# Altium PCB PCB.PcbDoc
Units mm, origin at the board's own origin, x right, y up, seen from the top; angles counter-clockwise.
Board outline 30 x 77.5 mm, 2 copper layers (Top Layer, Bottom Layer); 6 components, 2 nets, 46 pads, 0 vias.
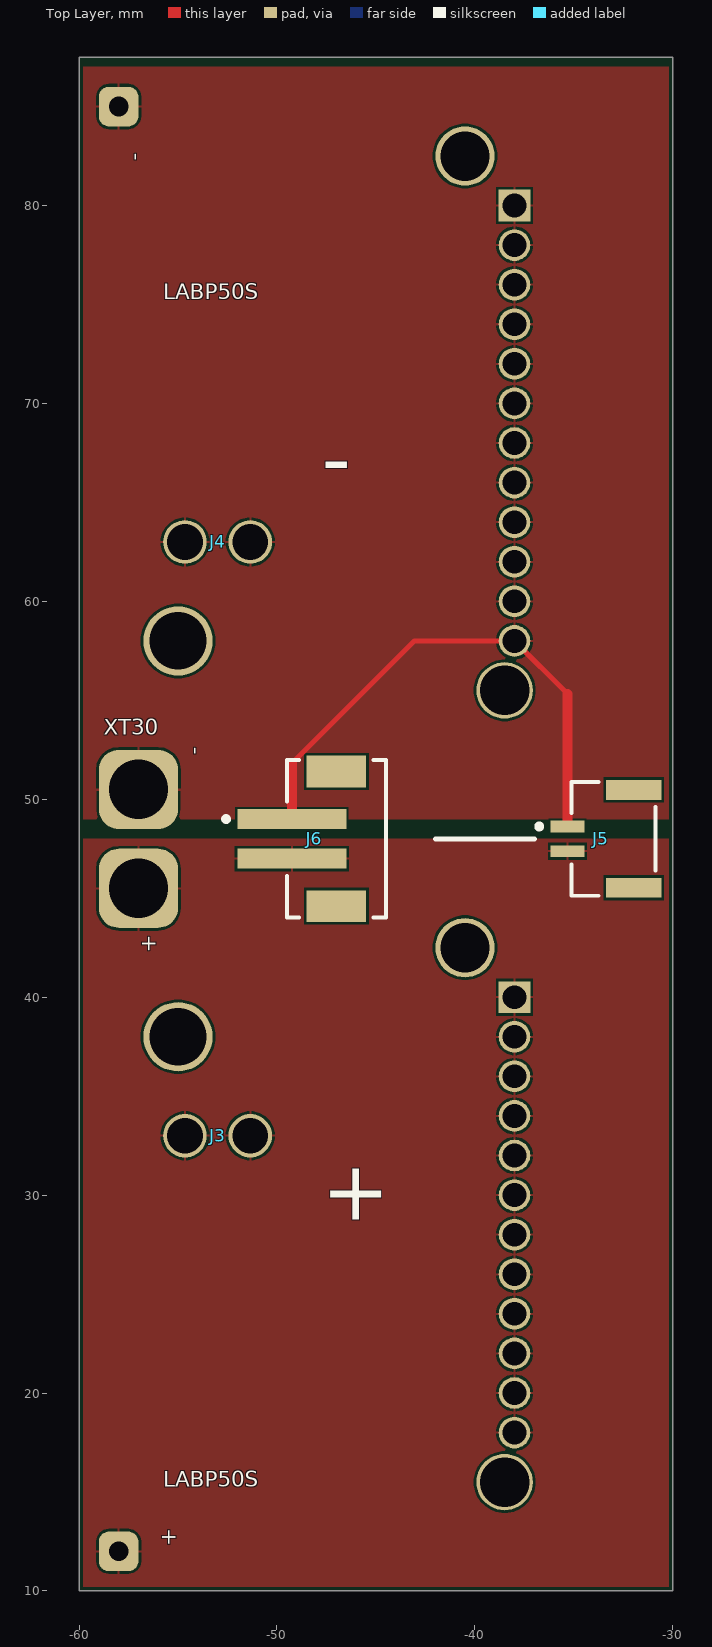
[diagram p0: Top Layer view]
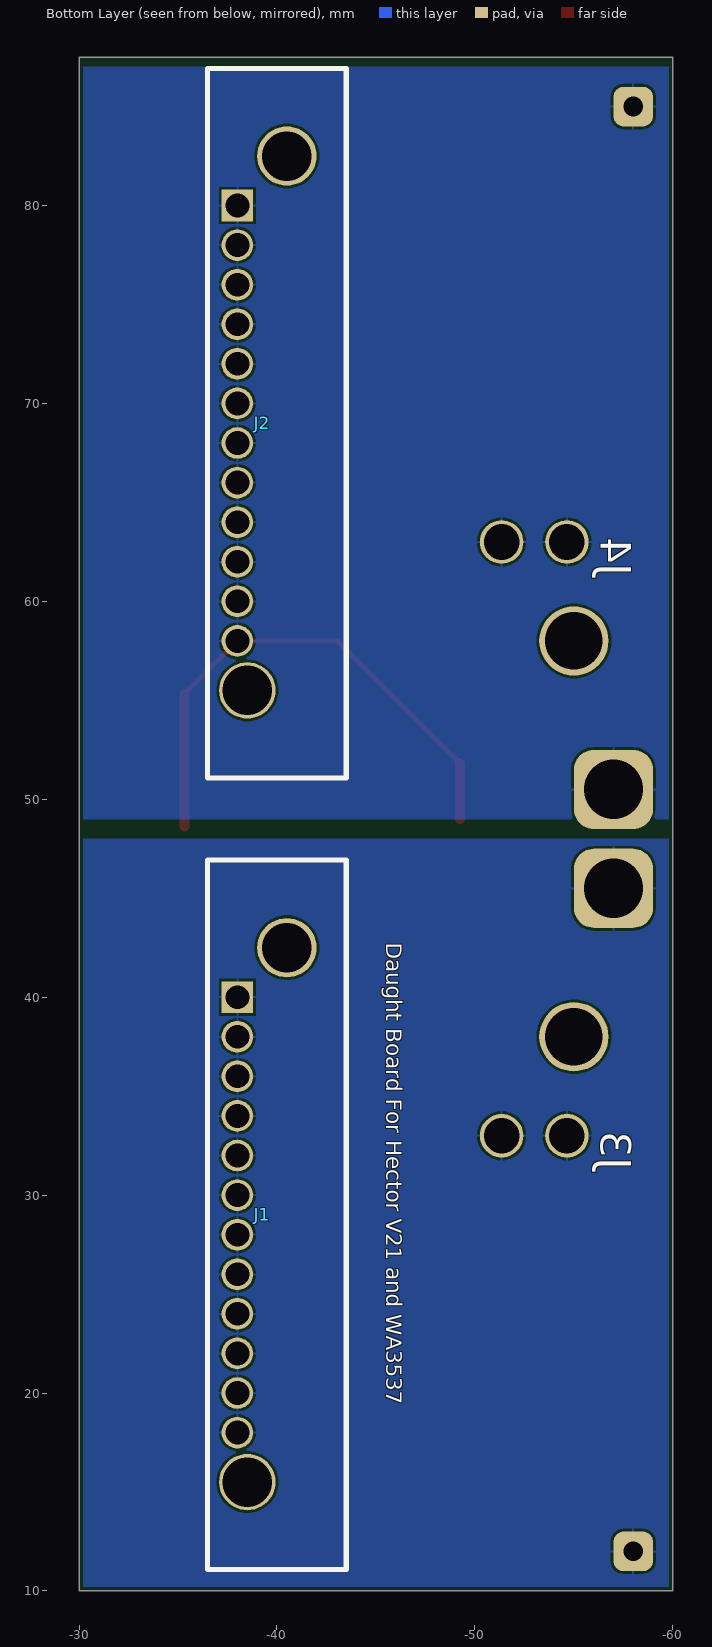
[diagram p1: Bottom Layer view, seen from below]
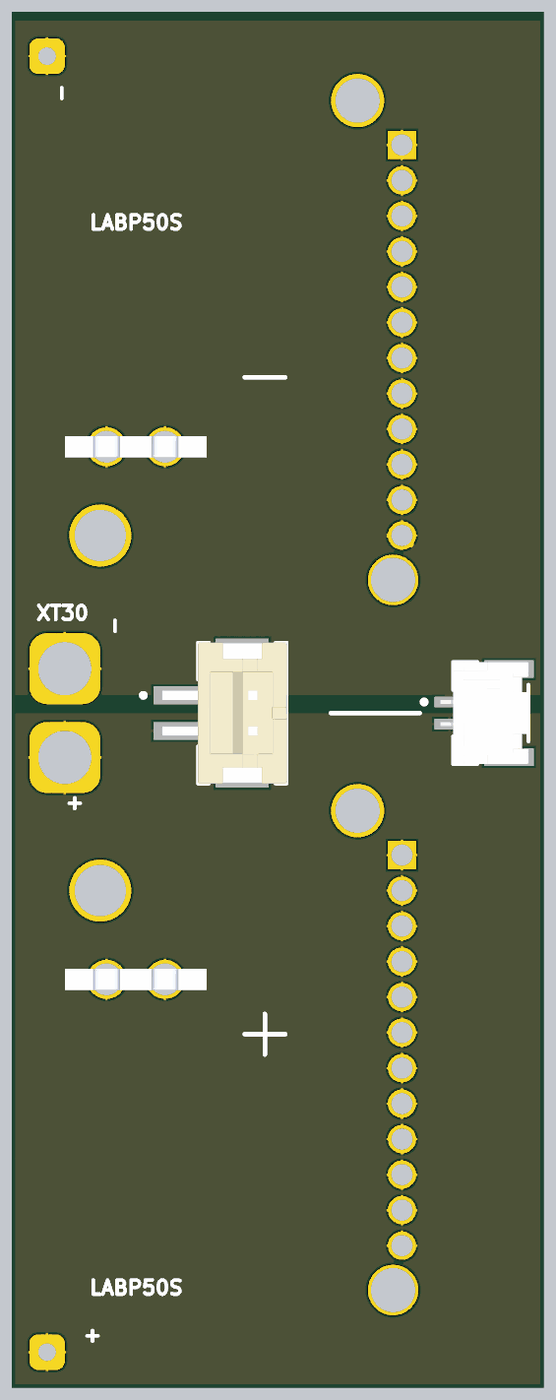
[diagram p2: 3D render of the assembled board from above, using the file's embedded part models]

## Layer stack, top to bottom
Top Solder: solder mask 0.0102, Solder Resist, Dk 3.5
Top Layer: signal copper 0.0356
Dielectric 1: dielectric 0.32, FR-4, Dk 4.8
Bottom Layer: signal copper 0.0356
Bottom Solder: solder mask 0.0102, Solder Resist, Dk 3.5

## Board outline
-60,10 -30,10 -30,87.5 -60,87.5

## Design rules (kind name [scope] priority, off if disabled: settings)
BoardOutlineClearance [All] p1: gap=0.2 ignorepadtopadclearanceinfootprint=FALSE
Clearance [All] p1: gap=0.127 ignorepadtopadclearanceinfootprint=TRUE except(0.254: Arc-Hole Track-Hole SMDPad-Hole THPad-Hole Via-Hole Fill-Hole Poly-Hole Region-Hole Text-Hole)
ComponentClearance [All] p1: gap=0.127 collisioncheckmode=3 verticalgap=0.127 showdistances=TRUE
DiffPairsRouting [All] p1: maxlimit=0.254 minlimit=0.127 mostfreqgap=0.127 toplayer_minwidth=0.127 toplayer_maxwidth=25.4 toplayer_prefwidth=0.127 bottomlayer_minwidth=0.127 bottomlayer_maxwidth=25.4 bottomlayer_prefwidth=0.127 maxuncoupledlength=12.7
Height [All] p1: minheight=0 maxheight=1816.048 prefheight=12.7
HoleSize [All] p1: absolutevalues=TRUE maxlimit=6.3 minlimit=0.3 maxpercent=80.000 minpercent=20.000
HoleToHoleClearance [All] p1: gap=0.254 allowstackedmicrovias=FALSE
MinimumAnnularRing [All] p1: minimumring=0.152
MinimumSolderMaskSliver [All] p1: minsoldermaskwidth=0.152
PlaneClearance [All] p1: clearance=0.127
PlaneConnect PlaneConnectPowerPads [InPadClass('PowerPads')] p1: planeconnectstyle=Direct reliefexpansion=0.508 reliefentries=4 reliefconductorwidth=0.254 reliefairgap=0.254
PlaneConnect [All] p2: pad.planeconnectstyle=Relief pad.reliefexpansion=0.3 pad.reliefentries=4 pad.reliefconductorwidth=0.127 pad.reliefairgap=0.127 via.planeconnectstyle=Direct via.reliefexpansion=0.3 via.reliefentries=4 via.reliefconductorwidth=0.127 via.reliefairgap=0.127
PolygonConnect PolygonConnectPowerPads [All vs (InPadClass('PowerPads'))] p1: connectstyle=Direct reliefconductorwidth=0.254 reliefentries=4 polygonreliefangle="90 Angle" airgapwidth=0.254
PolygonConnect [All] p2: thpad.connectstyle=Relief thpad.reliefconductorwidth=0.127 thpad.reliefentries=4 thpad.polygonreliefangle="90 Angle" thpad.airgapwidth=0.127 smdpad.connectstyle=Relief smdpad.reliefconductorwidth=0.127 smdpad.reliefentries=4 smdpad.polygonreliefangle="90 Angle" smdpad.airgapwidth=0.127 via.connectstyle=Direct via.reliefconductorwidth=0.127 via.reliefentries=4 via.polygonreliefangle="90 Angle" via.airgapwidth=0.127
RoutingVias [All] p1: holewidth=0.3 width=0.6 viastyle="Through Hole" minholewidth=0.3 minwidth=0.6 maxholewidth=0.6 maxwidth=6.6
SilkToSilkClearance [All] p1: silktosilkclearance=0.127
SilkToSolderMaskClearance [IsPad] p1: minsilkscreentomaskgap=0.127 clearancetoexposedcopper=TRUE
SolderMaskExpansion [All] p1: expansion=0.051 istentingtop=FALSE
SupplyNets "Schematic Supply Nets_1" [InNet('VCC')] p1: voltage=0.000
SupplyNets "Schematic Supply Nets" [InNet('GND')] p2: voltage=0.000
UnRoutedNet [All] p1: checkbadconnections=TRUE
Width Width_10mil [All] p1: maxlimit=25.4 minlimit=0.254 preferedwidth=0.254 minimp=50.000000 maximp=50.000000 favimp=50.000000
Width Width_6mil [All] p2: maxlimit=25.4 minlimit=0.152 preferedwidth=0.152 minimp=50.000000 maximp=50.000000 favimp=50.000000
Width Power_20mil [All] p3: maxlimit=25.4 minlimit=0.508 preferedwidth=0.508 minimp=50.000000 maximp=50.000000 favimp=50.000000
Width Power_12mil [All] p4: maxlimit=25.4 minlimit=0.305 preferedwidth=0.305 minimp=50.000000 maximp=50.000000 favimp=50.000000
Width Width_5mil [All] p5: maxlimit=25.4 minlimit=0.127 preferedwidth=0.127 minimp=50.000000 maximp=50.000000 favimp=50.000000
19 further rules are at their usual default settings.

## Components (designator, comment, footprint, x,y, rotation, side; value= is the part's Value field where it differs from the comment)
J1 "A01F-H1-A Female" A01F-H1-A -38,29 r270 bottom
J2 "A01F-H1-A Female" A01F-H1-A -38,69 r270 bottom
J3 "LRBP50S" LRBP50S -53,33 r90 top
J4 "LRBP50S" LRBP50S -53,63 r90 top
J5 "BM02B-GVHS-TB(LF)(SN)" FP-BM02B-GVHS-TB_LF_SN-MFG -33,48 r90 top
J6 "B2B-PH-SM4-TB(LF)(SN)" FP-B2B-PH-SM4-TB_LF_SN-MFG -47,48 r270 top

## Footprints (in the part's own frame and the unit in brackets; to place one, negate y for a bottom-side part, rotate by r counter-clockwise, add the part's x,y. Pads: shape width x height; smd on the part's side, far side on the other; paste and mask are expansions set on the pad)
A01F-H1-A [mm]
  rect 1.6x1.6 hole 1.2: 1(-11,0)
  round 1.6 hole 1.2: 2(-9,0) 3(-7,0) 4(-5,0) 5(-3,0) 6(-1,0) 7(1,0) 8(3,0) 9(5,0) 10(7,0) 11(9,0) 12(11,0)
  round 3 hole 2.5: 13(-13.5,2.5)
  round 2.85 hole 2.5: 14(13.5,0.5)
  silkscreen extent -17.93,-1.5 17.93,5.5, body extent -16.5,-1 16.5,5.5, height 1.7
FP-B2B-PH-SM4-TB_LF_SN-MFG [mm]
  rect 1x5.5 smd paste+0 mask+0: 1(-1,-2.25) 2(1,-2.25)
  rect 1.6x3 smd paste+0 mask+0: 3(-3.4,0) 4(3.4,0)
  silkscreen extent -3.98,-5.7 3.98,2.5, body extent -4.3,-5.1 4.3,2.6, height 0.25
FP-BM02B-GVHS-TB_LF_SN-MFG [mm]
  rect 0.6x1.7 smd paste+0 mask+0: 1(0.625,2.325) 2(-0.625,2.325)
  rect 1x2.8 smd paste+0 mask+0: 3(-2.475,-1.025) 4(2.475,-1.025)
  silkscreen extent -2.88,-2.12 2.88,3.87, body extent -3.08,-2.52 3.08,3.27, height 0.25
LRBP50S [mm] "Laser Robotic Battery Pin 50 mm Straight"
  round 2.2 hole 1.8 unplated: 1(0,1.65) 2(0,-1.65)
  body extent -0.6,-4 0.6,4, height 1.8

## Part data
J1 J2: library part A01F-H1-A, ComponentLink1Description="New link", ComponentLink1URL=https://www.aliexpress.us/item/3256806678504944.html?spm=a2g0o.detail.pcDetailBottomMoreOtherSeller.2.357aedyPedyPyt&gps-id=pcDetailBottomMoreOtherSeller&scm=1007.40050.354490.0&scm_id=1007.40050.354490.0&scm-url=1007.40050.354490.0&pvid=a768a161-9901-4811-b101-05a15b7a8653&_t=gps-id:pcDetailBottomMoreOtherSeller,scm-url:1007.40050.354490.0,pvid:a768a161-9901-4811-b101-05a15b7a8653,tpp_buckets:668%232846%238110%231995&isseo=y&pdp_npi=4%40dis%21USD%211.52%210.99%21%21%211.52%210.99%21%402103244617225425575533636e8077%2112000038560097796%21rec%21US%21%21ABX&utparam-url=scene%3ApcDetailBottomMoreOtherSeller%7Cquery_from%3A
J5: library part CMP-17439-000342-1, "CONN HEADER SMD 2POS 1.25MM", Color=Natural, Flammability Rating="UL94 V-0", Max Operating Temperature=85°C, Min Operating Temperature=-25°C, Voltage Rating=50V, Connector Type=Header, Contact Finish - Mating=TIN, Contact Material=Bronze, Contact Plating=Tin, Contact Shape=Rectangular, Contact Type="Outer Shroud Contact", Fastening Type=Latch, Insulation Color=Natural, Insulation Material=Nylon, Mated Stacking Heights=8.8mm, Mount="Surface Mount", Number of Positions=2, Number of Rows=1, Packaging="Cut Tape", Pitch=0.049inch, Series=GVH, Termination=Solder
J6: library part CMP-2000-05163-2, "CONN HEADER SMD 2POS 2MM", Color=White, Contact Resistance=20mR, Current Rating=2A, Flammability Rating="UL94 V-0", Housing Color=Beige, Insulation Color=Natural, Insulation Resistance=1GR, Max Operating Temperature=85°C, Max Voltage Rating (AC)=100V, Min Operating Temperature=-25°C, Connector Type=Header, Contact Finish - Mating=TIN, Contact Material="Copper Alloy", Contact Mating Length=0.13inch, Contact Plating=Tin, Contact Shape=Square, Contact Type="Male Pin", Depth=5mm, Fastening Type=Detent, Gender=Male, Height=9.4mm, Housing Material=Polyamide, Insulation Material=Nylon, Lead Free="Lead Free", Lead Pitch=2mm, Length=7.95mm, Mated Stacking Heights=8.6mm, Max Current Rating=2A, Mount="Surface Mount", Number of Contacts=2, Number of Poles=2, Number of Positions=2, Number of Rows=1, Orientation=Straight, Packaging="Tape and Reel", Pitch=2mm, REACH SVHC="No SVHC", Series=PH, Termination=Solder, Voltage Rating=100V, Voltage Rating (AC)=100V, Width=5.5mm, Working Voltage=100V

## Free pads (board coordinates)
  round 3.5 hole 2.9: 9(-55,58) 10(-55,38)
  rrect50% 2x2 hole 1: 11(-58,12) 12(-58,85)
  rrect50% 4x4 hole 3: 13(-57,50.5) 14(-57,45.5)

## Nets (pads, with @x,y where several pads share a name; then routed paths per layer and width w, separated by ;. In a path a pad name is that pad's centre, name@x,y a point inside that pad or via, vN(x,y) a via of type N, cw(c..) or ccw(c..) an arc to the next point about the centre after c; other vN are vias at no path point)
GND: J2.1 J2.2 J2.3 J2.4 J2.5 J2.6 J2.7 J2.8 J2.9 J2.10 J2.11 J2.12 J4.1 J4.2 J5.1 J6.1 pad.12 pad.13 | length 27.1
  Top Layer w0.254: -49.25,51.809 -43.059,58 J2.12 -35.325,55.325
  Top Layer w0.5: J6.1 -49.25,51.809 ; J5.1 -35.325,55.325
VCC: J1.1 J1.2 J1.3 J1.4 J1.5 J1.6 J1.7 J1.8 J1.9 J1.10 J1.11 J1.12 J3.1 J3.2 J5.2 J6.2 pad.11 pad.14
pads on no net: J1.13 J1.14 J2.13 J2.14 J5.3 J5.4 J6.3 J6.4

## Polygon pours and split planes (outlines as drawn)
GND on Top Layer "GND_L01_P001" (solid, remove dead copper, pour order 1): -60,87 -30,87 -30,49 -60,49
VCC on Top Layer "VCC_L01_P000" (solid, remove dead copper, pour order 0): -60,48 -30,48 -30,10 -60,10
GND on Bottom Layer "GND_L02_P003" (solid, remove dead copper, pour order 3): -60,87 -30,87 -30,49 -60,49
VCC on Bottom Layer "VCC_L02_P002" (solid, remove dead copper, pour order 2): -60,48 -30,48 -30,10 -60,10

## Silkscreen, mask and mechanical layers (free items; w line width, h text height)
Top Overlay:
  lines w0.254: -42,48 -37,48
  text "-" at -56.854,82.254 h0.8 r90
  text "LABP50S" at -55.746,75.254 h0.8
  text "-" at -47.746,65.754 h3
  text "XT30" at -58.746,53.254 h0.8
  text "-" at -53.854,52.254 h0.8 r90
  text "+" at -56.121,42.254 h0.8 r90
  text "+" at -47.746,28.754 h3
  text "LABP50S" at -55.746,15.254 h0.8
  text "+" at -55.121,12.254 h0.8 r90
Bottom Overlay:
  text "Daught Board For Hector V21 and WA3537" at -45.521,42.746 h0.8 r90